# Altium PCB SHMP_MainBoard.PcbDoc (part 2 of 2)
Units mil, origin at the board's own origin, x right, y up, seen from the top; angles counter-clockwise.
Board outline 4724.41 x 2755.91 mil, 4 copper layers (Top Layer, Ground Plane, Power Plane, Bottom Layer), stack 59.692 mil thick; 115 components, 109 nets, 467 pads, 438 vias.
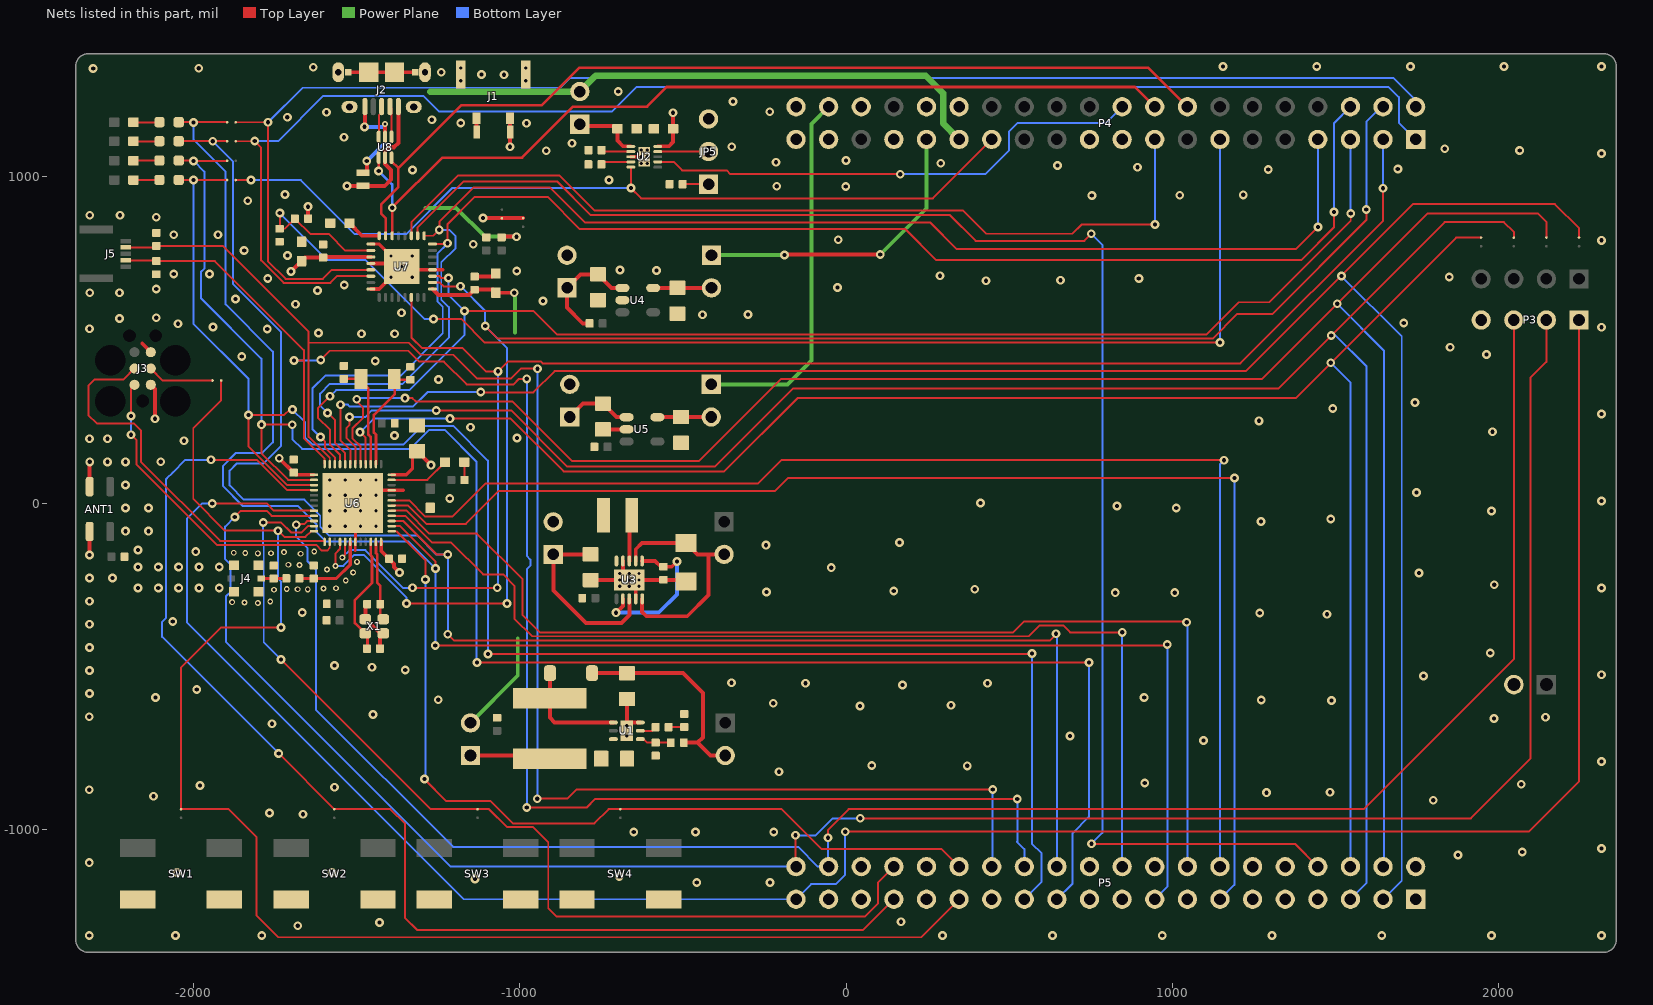
[diagram p4: the nets of this part, all layers, seen from the top]

## Via types
v1: diameter 27, hole 13, Top Layer to Bottom Layer, tented top, 368 vias
v2: diameter 18, hole 10, Top Layer to Bottom Layer, 34 vias
v3: diameter 18, hole 10, Top Layer to Bottom Layer, tented top, 26 vias
v4: diameter 18, hole 10, Top Layer to Bottom Layer, tented both sides, 9 vias
v5: diameter 27, hole 13, Top Layer to Bottom Layer, 1 vias

## Nets (pads, with @x,y where several pads share a name; then routed paths per layer and width w, separated by ;. In a path a pad name is that pad's centre, name@x,y a point inside that pad or via, vN(x,y) a via of type N, cw(c..) or ccw(c..) an arc to the next point about the centre after c; other vN are vias at no path point) (continued)
GND: ANT1.3 ANT1.4 C1.2 C2.2 C3.2 C4.2 C5.2 C6.2 C7.2 C8.2 C9.2 C10.2 C11.2 C12.2 C13.2 C14.2 C15.2 C16.2 C17.2 C18.2 C19.1 C20.2 C21.2 C22.1 C23.2 C24.1 C25.1 C26.1 C27.2 C28.2 C29.2 C30.2 C31.2 C32.2 C33.2 J1.0 J3.5 J4.2 NT3.2 NT6.2 P1.2 P3.4 P4.19 P4.21 P4.30 P4.32 P4.33 P4.36 P4.37 P4.40 P5.1 P5.2 P5.7 P5.9 P5.10 P5.11 P5.12 P5.15 P5.18 P5.19 P5.21 P5.22 P5.27 P5.31 P5.32 P5.35 P5.36 P5.37 R2.1 R4.2 R5.2 R12.1 R13.1 R14.2 R16.2 R18.1 RT1.1 SB2.1 SB3.1 SW1.1 SW2.1 SW3.1 SW4.1 U1.3 U1.7 U2.3 U2.11 U3.4 U3.9 U3.11 U4.2 U5.2 U6.31 U6.45 U6.49 U7.4 U7.17 U7.20 U7.24 U7.33 X1.2 X1.4 | length 1834.3
  Top Layer w8: -1504.3,-146.8 U6.31@-1504.3,-119.09
  Top Layer w9: U6.31@-1504.3,-119.09 U6.49@-1504.3,-7.87
  Top Layer w10: U6.49@-1472.81,39.37 U6.45@-1393.08,39.37 -1357.1,39.37 ; U7.17@-1456.95,793.91 -1431.36,793.91 v4(-1394.94,757.49) ; U2.3@-659.94,1061.7 v2(-627.46,1061.7)
  Top Layer w12: v1@-2319.37,-159.2 ANT1.4@-2319.37,-87.59 ; ANT1.3@-2319.37,50.2 v1@-2319.37,126.3 ; -2157.9,488.6 J3.5@-2131.8,462.5 ; C33.2@-1669.5,800.8 C33.2@-1661.5,792.8 ; C14.2@-1474,-315.5 X1.2@-1474,-356.39 -1471.48,-356.39 X1.4@-1428.18,-399.7 ; U7.24@-1456.95,656.11 -1456.95,656.3 -1431.17,656.3 v4(-1394.94,692.53) v4(-1362.45,725.01) -1372.3,734.85 U7.20@-1456.95,734.85 ; C17.2@-1429,-446.3 X1.4@-1429,-409.82 ; U7.33@-1352.62,715.17 U7.4@-1267.97,715.17 -1237.6,715.17 ; C30.2@-1139.8,694.1 -1083.3,694.1 C31.2@-1073.6,703.8 ; v1(-1112.8,873.6) -1054.5,873.6 -1054.4,873.7 SB3.1@-990.2,873.7 ; C6.2@-782.8,-236.39 U3.11@-665,-236.39 ; C10.2@-745.18,225.82 U5.2@-672.84,225.82 ; U3.11@-684.09,-216.1 U3.4@-684.09,-177.71 ; v2(-672.14,-714.26) U1.7@-672.14,-698.51 v2(-672.14,-682.76) ; C4.2@-672.14,-601.24 v2(-672.14,-682.76) ; v2(-664.4,-235.78) C7.2@-495.2,-235.79 ; U3.9@-644.71,-293.86 U3.11@-644.71,-255.47 ; U1.3@-630.8,-672.92 -662.3,-672.92 v2(-672.14,-682.76) ; v2(-627.46,1061.7) U2.11@-618.6,1061.7
  other v1: -2320.7,-1326.5 -2056.1,-1326.5 -1791.5,-1326.5 296.3,-1325.8 632.97,-1325.8 969.63,-1325.8 1306.3,-1325.8 1642.97,-1325.8 1979.63,-1325.8 2316.3,-1325.8 -1681.3,-1296.1 -1430.3,-1286.5 168.4,-1283.8 -457.4,-1163.7 -233.1,-1163.7 -1137.4,-1152.9 -695.5,-1144.9 -2051,-1133.4 -1576.5,-1132 -2320.7,-1102.75 1876.5,-1079.6 2073.7,-1070.5 2316.3,-1059.4 -650.7,-1008.4 -461.7,-1008.4 -221.8,-1008.4 -1664.9,-954.1 -1767.7,-950.3 1801,-911.4 -2123.8,-898.9 1289.4,-888.1 1484.3,-886.9 -2320.7,-879.01 -1568.3,-871.3 -1980.9,-866.3 2070.6,-862.5 915.8,-858.3 -205.1,-824.2 371.7,-806 78.8,-804.9 2316.3,-793 1096.1,-728.2 687.2,-714.8 -1760.2,-676.9 1987.3,-660.7 2144.8,-656.7 -2320.7,-655.26 -1450.6,-648.8 43,-622.1 321.8,-620 -223.3,-613.8 1488.9,-605.4 1273.4,-604.2 -1250.4,-603.1 -2117.6,-596.7 914.2,-596.3 -2320,-584.4 -1990.9,-571.6 173.2,-557.9 -123.9,-552.9 433.5,-552.9 -350.9,-551.3 1771.1,-530.6 2316.3,-526.6 -2320,-513.53 -1351.7,-512.2 -1453.4,-503.7 -1568.4,-498.1 1975.3,-460.3 -2320,-442.66 -2320,-371.8 -2064.5,-363.7 1475.2,-340.9 1268.9,-337.5 -1667.3,-336 -2320,-300.93 825.4,-274.8 1007.8,-274.8 -244.1,-272.7 146.3,-269.9 394.6,-264.4 -2170.7,-260.7 -2108.53,-260.7 -2046.35,-260.7 -1984.18,-260.7 -1922,-260.7 2316.3,-260.2 1987.7,-250.6 -2320,-230.07 -2249.13,-230.07 1757.3,-214.7 -45.4,-198.2 -2170.7,-196.2 -2108.53,-196.2 -2046.35,-196.2 -1984.18,-196.2 -1922,-196.2 -2320,-159.2 -1993.7,-149.1 -2170.7,-144.4 -245.4,-129.2 164.2,-121 -2209.44,-86.23 -2138.58,-86.23 1272.3,-57 1486.6,-49.1 1979.4,-24.4 -2209.44,-15.42 -2138.58,-15.42 1012.4,-14.9 831.1,-9.2 412.5,0.4 2316.3,6.2 -1215.1,14.2 1749.1,32.2 -2209.44,55.39 -2319.2,126.2 -2264.32,126.2 -2209.44,126.2 -2101.3,126.8 -2029.8,190.8 -2319.37,197.17 -2264.32,197.07 -1008.9,199.1 -1384.4,206.7 1982.2,218.4 -1151.4,232.3 1266.6,251.9 2316.3,272.6 1492.3,289.5 1744.9,308 -1249.9,379.1 -1443.3,435.3 -1853,449.1 1964.2,455.6 1852.5,477.7 -1485.5,518.9 -1384,518.9 -1617.1,521 -2319.37,534.4 -1774.4,533.8 -1940.8,539.4 2316.3,539 -2048.6,549.4 1710.4,552.2 -2227.7,565.7 -2115,568.2 -439.8,577.3 -300.8,577.9 -1363.3,583.2 -1688.2,609.2 -929.1,619.7 -1872.2,625.9 -2319.2,645 -2227.7,645 -1620.3,651.6 -2115,656.3 -26.1,661.1 -1538.4,668.2 429,681.8 658,683.2 -1773,688.8 898,688.7 1849.8,692.8 288.3,697 -2061.4,702.4 -1952,702.4 -1009.3,711.5 -581.4,713.1 -693.3,714.4 -1845.5,774.2 -1143.2,793.2 2316.3,805.4 -23.8,807 -2061.4,822.7 -1925.9,822.7 -2115,876.4 -2319.2,882.4 -2226.3,882.4 -1834.6,926.9 753.9,942.8 1023.4,943.8 1218.2,944.9 -1719.9,945.8 -212.6,971.3 -1,970.6 -726.4,990.5 -1329.5,1020.9 1294.9,1022.8 1692.2,1024.5 893.8,1029.3 648.7,1035 290.6,1042.1 -214.7,1044.9 -0.3,1049.9 2316.3,1071.8 -919.3,1079.9 2065.6,1081.1 1836.1,1086.1 -350.6,1092.3 -840.5,1103.1 -1539.1,1121.3 -1181.6,1165.2 -979.5,1164.7 -1269.9,1175.3 -1713,1183 -1593.2,1198.2 -233.8,1199.7 -346.7,1230.9 -698.2,1261.5 -1048.5,1313.2 -1117.9,1313.9 -1241.1,1321 -2308.5,1332.1 -1984.4,1333.2 -1633.4,1336.2 1156,1338.2 1443.27,1338.2 1730.55,1338.2 2017.82,1338.2 2316.3,1338.2
  other v2: -693.93,-255.47 -664.4,-255.47 -634.87,-255.47 -693.93,-235.78 -634.87,-235.78 -693.93,-216.1 -664.4,-216.1 -634.87,-216.1 -1583.04,-70.86 -1535.8,-70.86 -1488.56,-70.86 -1441.31,-70.86 -1583.04,-23.62 -1535.8,-23.62 -1488.56,-23.62 -1441.31,-23.62 -1583.04,23.63 -1535.8,23.63 -1488.56,23.63 -1441.31,23.63 -1583.04,70.87 -1535.8,70.87 -1488.56,70.87 -1441.31,70.87 -627.46,1041.03 -609.74,1041.03 -609.74,1061.7 -627.46,1082.37 -609.74,1082.37
  other v3: -1803.38,-306.5 -1844.38,-304.7 -1882.18,-304 -1765.58,-302.2 -1754.08,-265.8 -1650.3,-264.7 -1714.88,-264 -1681.38,-264.4 -1602.28,-262.2 -1564.18,-261.5 -1533.8,-237.9 -1511.3,-213.2 -1591.6,-204 -1675.98,-189.9 -1709.88,-189.2 -1499.2,-180.4 -1672.3,-155.4 -1803.38,-154.3 -1763.5,-154.2 -1877.48,-152.5 -1842,-153 -1723.48,-150.7 -1630.38,-148.6
  other v4: -1329.98,692.53 -1329.98,757.49 -1181.11,1294.57 -982.29,1294.57 -1181.11,1333.94 -982.29,1333.94
  other v5: -1712.5,758.6
GPIO02: P5.8 U7.10 | length 4855.5
  Top Layer w6: U7.10@-1313.24,819.5 -1313.24,844.96 -1171.7,986.5 -886.2,986.5 -783.5,883.8 317.4,883.8 397.2,804 730.65,804 v1(752.15,825.5) ; v1(752.6,-1045) 1376.8,-1045 P5.8@1446.8,-1115
  Bottom Layer w6: v1(752.15,825.5) 786,791.65 786,-1011.6 v1(752.6,-1045)
ISET: R4.1 U2.2 | length 84.9
  Top Layer w6: R4.1@-744.85,1077.45 U2.2@-659.94,1077.45
ISET2: P4.20 U2.7 | length 1559.3
  Top Layer w6: U2.7@-577.26,1045.95 -528.65,1045.95 -502.6,1019.9 -366.3,1019.9 -354.6,1008.2 v1(166.2,1008.2)
  Bottom Layer w6: v1(166.2,1008.2) 427.1,1008.2 499.4,1080.5 499.4,1138.4 525.8,1164.8 796.6,1164.8 P4.20@846.8,1215
NetC2_1: C2.1 JP2.1 L1.1 U1.6 | length 232.8
  Top Layer w12: JP2.1@-1151.4,-773.6 L1.1@-918.62,-773.6
NetC3_1: C3.1 JP1.1 U2.1 | length 205.4
  Top Layer w12: JP1.1@-816.1,1161.7 -809.9,1155.5 -708.8,1155.5 C3.1@-701.1,1147.8 -701.1,1111.7 -683.38,1093.98 U2.1@-659.94,1093.98
NetC4_1: C4.1 D1.1 JP3.2 R1.2 | length 667.2
  Top Layer w12: D1.1@-778.7,-521.4 C4.1@-672.1,-521.4 ; C4.1@-671.7,-521.8 -499.7,-521.8 -438.6,-582.9 -438.6,-718.5 -454.9,-734.8 ; R1.2@-497.4,-734.8 -454.9,-734.8 ; JP3.2@-370.2,-774.2 -415.5,-774.2 -454.9,-734.8
NetC5_1: C5.1 R3.2 | length 47.6
  Top Layer w6: R3.2@-544.1,-687.2 C5.1@-496.5,-687.2
NetC6_1: C6.1 JP4.1 L2.1 U3.5 U3.8 | length 557.7
  Top Layer w12: C6.1@-782.8,-157.39 -896.4,-157.39 -896.4,-268.79 -797.69,-367.5 -688.01,-367.5 -664.4,-343.89 U3.8@-664.4,-293.86
NetC7_1: C7.1 JP6.2 U3.2 U3.10 | length 729.9
  Top Layer w12: U3.2@-644.71,-177.71 -644.71,-141.7 -625.5,-122.49 C7.1@-490.5,-122.49 -455.5,-157.49 JP6.2@-373.8,-157.49 ; U3.10@-625.03,-293.86 -625.03,-333.77 -611.7,-347.1 -486.7,-347.1 -421.8,-282.2 -421.8,-157.2
NetC9_1: C9.1 JP7.1 R6.2 U4.1 | length 354
  Top Layer w12: R6.2@-786.2,550.7 -807.1,550.7 -855.3,598.9 JP7.1@-855.3,659.7 -813.8,701.2 C9.1@-760.3,701.2 -718.5,659.4 U4.1@-685.64,659.4
NetC10_1: C10.1 JP9.1 U5.1 | length 208.4
  Top Layer w12: JP9.1@-847.1,263.8 -806.2,304.7 C10.1@-745.3,304.7 -703.82,263.22 U5.1@-672.84,263.22
NetC11_1: C11.1 JP8.2 U4.5 | length 178.4
  Top Layer w12: U4.5@-591.16,659.4 C11.1@-517.5,659.4 ; C11.1@-517.2,659.7 JP8.2@-412.5,659.7
NetC12_1: C12.1 JP10.2 U5.5 | length 164.7
  Top Layer w12: U5.5@-578.36,263.22 JP10.2@-413.68,263.22
NetC24_2: C24.2 L5.1 U6.30 | length 243.4
  Top Layer w10.11: L5.1@-1675.88,-231.5 C24.2@-1632.38,-231.5 -1562.58,-231.5 -1519.95,-188.87 -1519.95,-119.2 U6.30@-1520.05,-119.09
NetD1_2: D1.2 L1.2 U1.4 | length 337.8
  Top Layer w12: D1.2@-907.7,-521.4 -907.7,-598.48 L1.2@-908.2,-598.98 -908.2,-658.1 -893.38,-672.92 U1.4@-713.48,-672.92
NetD2_1: D2.1 R7.1 | length 79.3
  Top Layer w6: R7.1@-2184.9,1167.4 D2.1@-2105.63,1167.4
NetD3_1: D3.1 R8.1 | length 79.3
  Top Layer w6: R8.1@-2184.9,1109.1 D3.1@-2105.63,1109.1
NetD4_1: D4.1 R9.1 | length 79.3
  Top Layer w6: R9.1@-2184.9,990.4 D4.1@-2105.63,990.4
NetD5_1: D5.1 R10.1 | length 79.3
  Top Layer w6: R10.1@-2184.9,1049.7 D5.1@-2105.63,1049.7
NetL2_2: L2.2 U3.3 | length 132.6
  Top Layer w12: U3.3@-664.4,-177.71 L2.2@-664.4,-45.09
NetL3_2: L3.2 L4.1 | length 53.9
  Top Layer w6: L3.2@-1170,70.6 L4.1@-1170,124.5
NetL4_2: L4.2 U6.47 | length 185.9
  Top Layer w6: U6.47@-1393.08,70.87 -1283.83,70.87 L4.2@-1229.6,125.1
NetR1_1: R1.1 R2.2 U1.1 | length 97.7
  Top Layer w6: U1.1@-630.8,-724.1 -620.5,-724.1 -609.9,-734.7 R2.2@-584,-734.7 R1.1@-537.5,-734.7
NetR3_1: R3.1 U1.2 | length 35.4
  Top Layer w6: U1.2@-630.8,-698.51 R3.1@-595.41,-698.51
P0.02/AIN0: P5.6 SB15.2 U6.4 | length 5494.2
  Top Layer w6: v1(-1490.1,217.3) -1472.81,200.01 U6.4@-1472.81,119.1 ; v1(-1214,258.7) -1028.18,258.7 -866.18,96.7 -373.4,96.7 -148.7,321.4 1378.4,321.4 1870.9,813.9 SB15.2@1947.4,813.9
  Bottom Layer w6: v1(-1490.1,217.3) -1448.7,258.7 v1(-1214,258.7) ; v1(1486.4,430) 1546.8,369.6 P5.6@1546.8,-1115
P0.03/AIN1: P5.4 SB13.2 U6.5 | length 6120.3
  Top Layer w6: v1(-1500.4,318.2) -1500.4,312.1 -1481.5,293.2 -1481.5,260.6 -1513.6,228.5 -1513.6,198.3 -1488.56,173.26 U6.5@-1488.56,119.1 ; v1(-1352.5,321.6) -1329.8,321.6 -1320,311.8 -1023.3,311.8 -839.8,128.3 -450.8,128.3 -199.4,379.7 1274.8,379.7 v1(1506.1,611) 1782.7,887.6 2122.4,887.6 2147.7,862.3 SB13.2@2147.7,813.9
  Bottom Layer w6: v1(-1500.4,318.2) -1497,321.6 v1(-1352.5,321.6) ; v1(1506.1,611) 1649.7,467.4 1649.7,-1112.1 P5.4@1646.8,-1115
P0.04/AIN2: P5.5 SB14.2 U6.6 | length 5952.4
  Top Layer w6: v1(-1522.5,263.5) -1522.5,238.7 -1531.1,230.1 -1531.1,198.83 -1504.3,172.03 U6.6@-1504.3,119.1 ; v1(-1256.6,283.8) -1027.1,283.8 -854.7,111.4 -402.5,111.4 -163.3,350.6 1324.9,350.6 v1(1487.85,513.55) 1835.9,861.6 2017.5,861.6 2047.9,831.2 SB14.2@2047.9,813.9
  Bottom Layer w6: v1(-1522.5,263.5) -1474.4,263.5 -1454.1,283.8 v1(-1256.6,283.8) ; v1(1487.85,513.55) 1501.75,513.55 1596.7,418.6 1596.7,-1165.1 P5.5@1546.8,-1215
P0.05/AIN3: P5.3 SB12.2 U6.7 | length 6346.5
  Top Layer w6: v1(-1550.3,301.5) -1550.3,192.9 -1520.05,162.65 U6.7@-1520.05,119.1 ; v1(-1119.8,340.4) -1129,340.4 -1130.2,339.2 -958.6,339.2 -893.4,404.4 1226,404.4 v1@1519,697.4 ; v1(1519,695.9) v1@1519,697.4 ; SB12.2@2247.7,813.9 2247.7,842.7 2173.8,916.6 1738.2,916.6 v1@1519,697.4
  Bottom Layer w6: v1(-1550.3,301.5) -1527.2,301.5 -1521.4,295.7 -1491.08,295.7 -1490.98,295.8 -1327.8,295.8 -1283.2,340.4 v1(-1119.8,340.4) ; v1(1519,695.9) 1704.1,510.8 1704.1,-1157.7 P5.3@1646.8,-1215
P0.06: P4.7 U6.8 U7.9 | length 4301.7
  Top Layer w6: v1(-1589.6,276.3) -1566.4,253.1 -1566.4,183.3 -1535.8,152.7 U6.8@-1535.8,119.1 ; U7.9@-1293.56,819.5 -1265.7,819.5 -1247.6,837.6 v1(-1247.1,837.6) -1247.1,862.5 -1142.6,967 -907.2,967 -801,860.8 257.6,860.8 340.1,778.3 1379.4,778.3 v1(1447.1,846)
  Bottom Layer w6: v1(-1589.6,276.3) -1612.2,298.9 -1612.2,335.6 -1582.4,365.4 -1359.4,365.4 -1218,506.8 -1218,600.57 -1241.1,623.67 -1241.1,737.7 -1197.1,781.7 -1197.1,818.1 -1216.6,837.6 v1(-1247.1,837.6) ; v1(1447.1,846) P4.7@1447.1,1114.7
P0.07: P4.5 U6.9 U7.3 | length 4130.1
  Top Layer w6: v1(-1582.4,327.2) -1619.1,290.5 -1619.1,261.8 -1581.7,224.4 -1581.7,178.4 -1551.55,148.25 U6.9@-1551.55,119.1 ; U7.3@-1267.97,695.48 -1246.48,695.48 -1240.6,689.6 v1(-1218.6,689.6) ; v1(-1169.6,588.6) -957.7,588.6 -885.7,516.6 1105.1,516.6 1204.1,615.6 1297.9,615.6 1547.8,865.5 v1(1547.8,887.6)
  Bottom Layer w6: v1(-1582.4,327.2) -1563.3,346.3 -1338.6,346.3 -1169.6,515.3 v1(-1169.6,588.6) -1218.6,637.6 v1(-1218.6,689.6) ; P4.5@1546.8,1115 1546.8,888.6 v1(1547.8,887.6)
P0.08: P4.6 U6.10 U7.8 | length 4396.6
  Top Layer w6: v1(-1611.4,202.1) -1598.1,188.8 -1598.1,171 -1567.3,140.2 U6.10@-1567.3,119.1 ; U7.8@-1267.97,793.91 -1224.79,793.91 v1(-1221.9,796.8) -1221.9,854.5 -1138,938.4 -915.1,938.4 -817.6,840.9 180.9,840.9 277.1,744.7 1395.3,744.7 1496.4,845.8 v1(1496.4,892.3)
  Bottom Layer w6: v1(-1611.4,202.1) -1635.9,226.6 -1635.9,351.3 -1596.3,390.9 -1365.7,390.9 -1236.5,520.1 -1236.5,602.1 -1253.1,618.7 -1253.1,763.9 -1221.9,795.1 v1(-1221.9,796.8) ; v1(1496.4,892.3) 1496.4,1164.6 P4.6@1546.8,1215
P0.09/NFC1: C27.1 J5.2 P5.28 U6.11 | length 4821.8
  Top Layer w6: J5.2@-2208.5,783.6 C27.1@-2119.5,783.6 ; C27.1@-2114.8,788.3 -1911.2,788.3 -1647.5,524.6 -1647.5,491.4 ; U6.11@-1583.04,119.1 -1583.04,138.54 -1647.5,203 -1647.5,491.4 ; v1(-946.5,-906.6) -855.2,-906.6 -827.2,-878.6 v1(449.9,-878.6) ; v1(-946.1,411.9) -997.3,411.9 -1028,381.2 -1131.3,381.2 -1204.7,454.6 -1304,454.6 -1340.8,491.4 -1647.5,491.4
  Bottom Layer w6: v1@-946.1,-906.7 v1(-946.1,411.9) ; P5.28@446.8,-1115 449.9,-1111.9 v1(449.9,-878.6)
P0.10/NFC2: C23.1 J5.4 P5.26 U6.12 | length 4895.3
  Top Layer w6: J5.4@-2208.5,744.23 C23.1@-2117.33,744.23 ; C23.1@-2114.8,741.7 -1935.2,741.7 -1662.5,469 -1662.5,437.1 ; v1(-1693,437.1) -1662.5,437.1 ; v1(-1610.5,438.9) -1582.5,466.9 -1342.6,466.9 -1309.2,433.5 -1233,433.5 -1163.5,364 -1019.4,364 -1002.7,380.7 v1(-978.8,380.7) ; U6.12@-1598.79,119.1 -1598.79,135.39 -1662.5,199.1 -1662.5,437.1 ; v1(-978.9,-933.7) -795.6,-933.7 -769.4,-907.5 v1(525.3,-907.5)
  Bottom Layer w6: v1(-1693,437.1) -1612.3,437.1 v1(-1610.5,438.9) ; v1@-978.8,-933.7 -978.8,-203.42 -967.6,-192.22 -967.6,-173.58 -978.8,-162.38 v1(-978.8,380.7) ; v1(525.3,-907.5) 525.3,-1037.6 524.2,-1038.7 546.8,-1061.3 P5.26@546.8,-1115
P0.11: D5.2 P5.23 SB11.2 U6.14 | length 5374.6
  Top Layer w6: D5.2@-2046.17,1050.1 -2001.8,1050.1 v1@-2001.2,1049.5 ; v1(-2000.6,1048.9) SB11.2@-1897.9,1048.9 ; v1(-1697.7,240.1) -1697.9,240.3 v1(-1792.5,240.3) -1792.5,152.8 -1710.57,70.87 U6.14@-1631.27,70.87 ; v1(-1131.5,-488.7) -1131.9,-488.7 -1132.2,-488.4 744.4,-488.4 v1(745,-489)
  Bottom Layer w6: v1(-2000.6,1048.9) -1967.6,1015.9 -1967.6,718.62 -1977.8,708.42 -1977.8,628.1 -1792.5,442.8 v1(-1792.5,240.3) ; v1(-1697.7,240.1) -1697.7,196.2 -1667.6,166.1 -1336.6,166.1 -1278.5,224.2 -1230.82,224.2 -1132.4,125.78 v1@-1132.4,-488.7 ; P5.23@646.8,-1215 695.1,-1166.7 695.1,-1012.2 745,-962.3 v1(745,-489)
P0.12: D4.2 P5.25 SB10.2 U6.15 | length 5213.1
  Top Layer w6: D4.2@-2046.17,990.8 -2001.5,990.8 v1(-2000.9,990.2) SB10.2@-1897.9,990.2 ; v1(-1697.3,286.6) -1706,286.6 -1722.6,270 v1(-1832.4,270) -1832.4,174.77 -1712.75,55.12 U6.15@-1631.27,55.12 ; v1(-1097.7,-462.8) v1@571.7,-462.8
  Bottom Layer w6: v1(-2000.9,990.2) -2000.9,550.3 -1832.4,381.8 v1(-1832.4,270) ; v1(-1697.3,286.6) -1659.2,248.5 -1659.2,202.1 -1636.7,179.6 -1356.4,179.6 -1299.8,236.2 -1204.68,236.2 -1098.2,129.72 v1@-1098.2,-461.5 ; P5.25@546.8,-1215 599.9,-1161.9 599.9,-1074.4 570,-1044.5 v1(570,-461.5)
P0.13: P5.33 SB5.1 U6.16 | length 3830
  Top Layer w6: v1(-1947.4,132.4) -1807,132.4 -1713.97,39.37 U6.16@-1631.27,39.37 ; v1(-1739.7,-767.9) SB5.1@-1568.9,-938.7 -1396.8,-938.7 -1351.7,-983.8 -1351.7,-1272.9 -1315.5,-1309.1 52.7,-1309.1 P5.33@146.8,-1215
  Bottom Layer w6: v1(-1947.4,132.4) -2025.81,132.4 -2064.91,93.3 -2082.67,75.85 -2084.7,73.82 -2084.7,-352.08 -2097.1,-364.48 -2097.1,-410.5 v1(-1739.7,-767.9)
P0.15: P3.1 P5.39 U6.20 | length 6997.5
  Top Layer w6: v1(-1943.5,-1.1) -1776.8,-1.1 -1754.28,-23.62 U6.20@-1631.27,-23.62 ; v1(-2.2,-1007.9) 2092.9,-1007.9 2247.7,-853.1 P3.1@2247.7,561.26
  Bottom Layer w6: v1(-1943.5,-1.1) -1973.6,-1.1 -2021,-48.5 -2021,-365.7 -1171.7,-1215 P5.39@-153.2,-1215 -107,-1168.8 -31.6,-1168.8 -2.7,-1139.9 v1@-2.7,-1007.9
P0.16: P3.2 P5.40 U6.21 | length 6513.7
  Top Layer w6: v1(-1874,-42.8) -1855.2,-24 -1776.5,-24 -1761.13,-39.37 U6.21@-1631.27,-39.37 ; v1(-154.9,-1019) -154.9,-1109.9 -151.5,-1113.3 P5.40@-153.2,-1115 ; v1(43.7,-966.9) 1915.8,-966.9 2098.8,-783.9 2098.8,383.7 2147.7,432.6 P3.2@2147.7,561.26
  Bottom Layer w6: v1(-1874,-42.8) -1903.8,-72.6 -1903.8,-172 -1886.8,-189 -1886.8,-272 -1901.5,-286.7 -1901.5,-425.8 -1212.3,-1115 P5.40@-153.2,-1115 ; v1(-154.9,-1019) -93.1,-1019 -41,-966.9 v1(43.7,-966.9)
P0.19: P3.3 P5.38 U6.22 | length 5898.1
  Top Layer w6: v1(-1685.9,-66.5) -1685.9,-63.83 -1660.1,-63.83 -1651.39,-55.11 U6.22@-1631.27,-55.11 ; v1(-55.1,-1026.4) -55.1,-1002 8,-938.9 1587.5,-938.9 2047.7,-478.7 P3.3@2047.7,561.26
  Bottom Layer w6: v1(-1685.9,-66.5) -1685.9,-103 -1651.4,-137.5 -1651.4,-177.8 -1625.7,-203.5 -1625.7,-633.6 -1204.8,-1054.5 -146.5,-1054.5 -86,-1115 P5.38@-53.2,-1115 -55.1,-1113.1 v1(-55.1,-1026.4)
P0.20: P5.34 SB6.1 U6.23 | length 3048.2
  Top Layer w6: v1(-1787,-59.9) -1731.8,-59.9 -1701.8,-89.9 -1669.2,-89.9 -1650.16,-70.86 U6.23@-1631.27,-70.86 ; v1@-1735.4,-477.2 v1(-1732.4,-480.2) -1273.9,-938.7 SB6.1@-1129.9,-938.7 -1094.7,-938.7 -1039.3,-994.1 -959,-994.1 -913,-1040.1 -913,-1242.4 -887.3,-1268.1 57.8,-1268.1 98.4,-1227.5 98.4,-1163.4 P5.34@146.8,-1115
  Bottom Layer w6: v1(-1787,-59.9) -1787,-125.9 -1785.38,-127.52 -1785.38,-427.22 v1(-1732.4,-480.2)
P0.21/RESET: P5.29 SB1.1 SB4.1 U6.24 | length 4653.5
  Top Layer w6: SB4.1@-2039.4,-938.7 -2039.4,-505.5 -1915.4,-381.5 v1(-1732.88,-381.5) ; SB4.1@-2039.1,-938.7 -1893.3,-938.7 -1807.2,-1024.8 -1807.2,-1265.2 -1740.9,-1331.5 230.3,-1331.5 P5.29@346.8,-1215 ; SB1.1@-1915.8,375.7 -1915.8,315.4 -2001.6,229.6 -2001.6,12.4 -1904.3,-84.9 v1(-1741.4,-84.9) -1722.3,-104 -1657.7,-104 -1640.31,-86.61 U6.24@-1631.27,-86.61
  Bottom Layer w6: v1(-1741.4,-84.9) -1741.4,-143.16 -1741.48,-143.24 -1741.48,-158.15 -1741.4,-158.23 -1741.4,-231.9 -1732.88,-240.42 v1(-1732.88,-381.5)
P0.23: P4.4 U6.28 U7.2 | length 5053.8
  Top Layer w6: v3(-1565.2,-193) -1565.2,-154.4 -1551.55,-140.75 U6.28@-1551.55,-119.09 ; v1@-1347.8,-308.2 v1(-1347.5,-307.9) v1(-1039.7,-307.9) ; U7.2@-1267.97,675.8 -1245.4,675.8 -1234,664.4 v1(-1181.9,664.4) ; v1(-1106.3,542.7) -1067.7,504.1 1123.9,504.1 1198.7,578.9 1306.5,578.9 1595.4,867.8 v1(1595.4,900.2)
  Bottom Layer w6: v3(-1565.2,-193) v3@-1565.2,-185.7 ; v3@-1557.9,-193 -1541.5,-193 -1507.5,-159 -1478.5,-159 -1347.5,-290 v1(-1347.5,-307.9) ; v1(-1181.9,664.4) -1106.3,588.8 v1(-1106.3,542.7) -1039.7,476.1 v1(-1039.7,-307.9) ; v1(1595.4,900.2) 1595.4,1169.1 1641.3,1215 P4.4@1646.8,1215
P0.24: P4.3 U6.29 U7.30 | length 4839.4
  Top Layer w6: v3(-1544.4,-166.9) -1535.8,-158.3 U6.29@-1535.8,-119.09 ; U7.30@-1332.6,630.52 -1332.6,507.51 -1299.99,474.9 -1175.4,474.9 -1104.2,403.7 v1(-1067,403.7) -1036.3,434.4 -936.78,434.4 -930.28,427.9 1209,427.9 1646.8,865.7 v1(1646.8,965.2) ; v1(-1329.3,-260) v1(-1069.6,-260)
  Bottom Layer w6: v3(-1544.4,-166.9) -1522.2,-144.7 -1473.9,-144.7 -1358.6,-260 v1(-1329.3,-260) ; v1(-1069.6,-260) -1067,-257.4 v1(-1067,403.7) ; v1(1646.8,965.2) P4.3@1646.8,1115
P0.25: P5.30 SB7.1 U6.37 | length 2599.2
  Top Layer w6: U6.37@-1393.08,-86.61 -1378.29,-86.61 -1289.8,-175.1 v1(-1289.8,-234.7) ; v1(-1292.8,-846.3) -1225.3,-913.8 -1089.5,-913.8 -1021.2,-982.1 -771.5,-982.1 -728.1,-938.7 SB7.1@-691.7,-938.7 -197.4,-938.7 -75.5,-1060.6 292.4,-1060.6 P5.30@346.8,-1115
  Bottom Layer w6: v1(-1292.8,-846.3) -1289.8,-843.3 v1(-1289.8,-234.7)
P0.26: D2.2 P5.17 SB8.2 U6.38 | length 5728.9
  Top Layer w6: D2.2@-2046.07,1167.7 SB8.2@-1897.9,1167.7 ; U6.38@-1393.08,-70.86 -1367.34,-70.86 -1258.4,-179.8 v1(-1258.4,-201.1) ; v1(-1259.3,-437.1) 985,-437.1 v1(985,-433.9)
  Bottom Layer w6: v1(-2000.4,1167.1) -2000.4,1114 -1902.4,1016 -1902.4,609.3 -1757.3,464.2 -1757.3,186.1 -1789.9,153.5 -1870.5,153.5 -1911,113 -1911,52.7 -1849,-9.3 -1679.7,-9.3 -1624.1,-64.9 -1624.1,-88.6 -1595.2,-117.5 -1342,-117.5 v1(-1258.4,-201.1) -1257.2,-202.3 -1259.3,-204.4 v1(-1259.3,-437.1) ; P5.17@946.8,-1215 985.33,-1176.47 985.33,-434.23 v1(985,-433.9)
P0.27: D3.2 P5.24 SB9.2 U6.39 | length 5237
  Top Layer w6: D3.2@-2045.97,1109.7 SB9.2@-1897.9,1109.7 ; U6.39@-1393.08,-55.11 -1358.09,-55.11 -1255.3,-157.9 v1(-1221,-157.9) ; v1(-1221,-402.2) -1202.2,-421 626.2,-421 v1@645.1,-402.1
  Bottom Layer w6: v1(-1941.8,1109.2) -1880.1,1047.5 -1880.1,672 -1733,524.9 -1733,174.02 -1786.32,120.7 -1868.9,120.7 -1890.3,99.3 -1890.3,54 -1846.6,10.3 -1660.8,10.3 -1612.1,-38.4 -1612.1,-72.9 -1585.6,-99.4 -1315.3,-99.4 -1256.8,-157.9 v1(-1221,-157.9) v1(-1221,-402.2) ; v1(643.6,-400.6) 646.8,-403.8 P5.24@646.8,-1115
P0.28/AIN4: P5.20 U6.40 | length 3192.4
  Top Layer w6: U6.40@-1393.08,-39.37 -1350.93,-39.37 -1269,-121.3 -1210.4,-121.3 -1112.8,-218.9 -1051.7,-218.9 -1016.6,-254 -1016.6,-354.2 -962.3,-408.5 560.6,-408.5 593.6,-375.5 665.9,-375.5 687,-396.6 v1(846.9,-396.6)
  Bottom Layer w6: P5.20@846.8,-1115 v1@846.8,-396.6
P0.29/AIN5: P5.16 U6.41 | length 3421.2
  Top Layer w6: U6.41@-1393.08,-23.62 -1347.38,-23.62 -1277.2,-93.8 -1131.6,-93.8 -992.6,-232.8 -992.6,-342.7 -938.8,-396.5 512.6,-396.5 545.6,-363.5 1042.2,-363.5 v1(1044.5,-365.8)
  Bottom Layer w6: v1(1044.5,-365.8) 1046.8,-368.1 P5.16@1046.8,-1115
P0.30/AIN6: P5.13 U6.42 | length 3975.9
  Top Layer w6: U6.42@-1393.08,-7.87 -1342.83,-7.87 -1287,-63.7 -1165.3,-63.7 -1064.3,37.3 -217,37.3 -177.2,77.1 v1(1191,77.1)
  Bottom Layer w6: P5.13@1146.8,-1215 1191,-1170.8 v1(1191,77.1)
P0.31/AIN7: P5.14 U6.43 | length 3895.5
  Top Layer w6: U6.43@-1393.08,7.88 -1339.78,7.88 -1291,-40.9 -1206.3,-40.9 -1106.2,59.2 -270.3,59.2 -198.1,131.4 v1(1159.3,131.4)
  Bottom Layer w6: P5.14@1146.8,-1115 1146.8,118.9 v1(1159.3,131.4)
P\G\: P4.27 SB10.1 U2.5 | length 2597.4
  Top Layer w6: SB10.1@-1871.3,990.4 v1@-1824.5,990.4 ; U2.5@-659.94,1030.2 -659.94,966.34 v1(-659.5,965.9) -628,934.4 266.2,934.4 P4.27@446.8,1115
  Bottom Layer w6: v1(-1824.4,990.3) -1671.3,990.3 -1505.7,824.7 -1347.9,824.7 -1206.7,965.9 v1(-659.5,965.9)
P\O\W\E\R\: P4.17 U7.11 | length 2731.2
  Top Layer w6: U7.11@-1332.93,819.5 -1332.93,860.87 -1188.9,1004.9 -879.1,1004.9 -771.5,897.3 358.2,897.3 429.9,825.6 694.4,825.6 722.8,854 v1(947.8,854)
  Bottom Layer w6: P4.17@946.8,1115 947.8,1116 v1(947.8,854)
PRETERM: R5.1 U2.4 | length 82.2
  Top Layer w6: R5.1@-742.15,1045.95 U2.4@-659.94,1045.95
R\E\S\E\T\: P4.13 R17.1 R18.2 U7.18 | length 4057.1
  Top Layer w6: R18.2@-1737,841 -1720.9,841 R17.1@-1689.8,872.1 -1641.9,824.2 -1584.8,824.2 -1534.82,774.22 U7.18@-1456.95,774.22 ; R18.2@-1736,842 v1(-1736,889) ; v1(-1264.9,564) -1264.5,563.6 -1178.8,563.6 -1107.2,492 v1(1146.7,492)
  Bottom Layer w6: v1(-1736,889) -1592.8,745.8 -1473.66,745.8 -1291.86,564 v1(-1264.9,564) ; v1(1146.7,492) 1146.7,488.9 1146.8,488.8 P4.13@1146.8,1115
R\X\L\E\D\: P4.2 SB8.1 U7.21 | length 4499.4
  Top Layer w6: SB8.1@-1871.3,1167.5 v1@-1772.3,1167.5 ; v1@-1772.5,1167.4 -1772.5,741.1 -1718.5,687.1 -1604.3,687.1 -1576.23,715.17 U7.21@-1456.95,715.17
  Bottom Layer w6: v1(-1772.3,1167.4) -1666.4,1273.3 -875.9,1273.3 -845.3,1303.9 1678.5,1303.9 1746.8,1235.6 P4.2@1746.8,1215
RESET_N: J3.3 SB1.2 | length 204.7
  Top Layer w6: J3.3@-2131.8,412.5 -2094.8,375.5 SB1.2@-1942.4,375.5
RF: C25.2 J4.1 L5.2 | length 77.4
  Top Layer w10.11: J4.1@-1793.41,-231.4 L5.2@-1715.98,-231.4
RT1: JP5.1 RT1.2 | length 79.4
  Top Layer w6: RT1.2@-501,977.8 JP5.1@-421.6,977.8
RT2: JP5.3
S2.8V: JP10.1 P4.38 | length 1137.4
  Power Plane w12: JP10.1@-413.1,363.8 -179,363.8 -105.4,437.4 -105.4,1162.8 P4.38@-53.2,1215
SWDCLK: J3.4 U6.25 | length 1191.1
  Top Layer w6: J3.4@-2181.8,412.5 -2215.3,379 -2304.1,379 -2323.1,360 -2323.1,269.8 -2297.5,244.2 -2183.9,244.2 -2162.4,222.7 -2162.4,126.7 -1919.3,-116.4 U6.25@-1601.49,-116.4
SWDIO: J3.2 U6.26 | length 979.1
  Top Layer w6: v1(-2192.1,266.7) -2192.1,352.2 J3.2@-2181.8,362.5 ; v1@-2191.7,208.8 -2175.1,192.2 -2175.1,117.5 -1929.2,-128.4 -1625.1,-128.4 -1607.5,-146 -1591.17,-146 -1583.04,-137.87 U6.26@-1583.04,-119.09
  Bottom Layer w6: v1(-2192.1,209.2) v1(-2192.1,266.7)
T\X\L\E\D\: P4.1 SB9.1 U7.22 | length 4586.4
  Top Layer w6: SB9.1@-1871.3,1109.3 v1@-1813.2,1109.3 ; v1(-1813.2,1109.7) -1793.3,1089.8 -1793.3,744.2 -1724.2,675.1 -1581.2,675.1 -1560.82,695.48 U7.22@-1456.95,695.48
  Bottom Layer w6: v1(-1813.2,1109.7) -1741.3,1109.7 -1602.6,1248.4 -1296,1248.4 -1247.83,1200.23 -717.77,1200.23 -641.8,1276.2 1663.2,1276.2 1695.1,1244.3 1695.1,1166.7 P4.1@1746.8,1115
TS: JP5.2 U2.9 | length 155.5
  Top Layer w6: U2.9@-577.26,1077.45 JP5.2@-421.75,1077.45
USB_D_N: P4.16 U7.15 U8.6 | length 2872.4
  Top Layer w8: U7.15@-1411.67,819.5 -1411.67,873.37 -1425.3,887 -1425.3,916 -1372.8,968.5 -1372.8,1026.8 ; U8.6@-1393.62,1059.21 -1393.62,1047.61 -1372.8,1026.8 ; P4.16@1046.8,1215 927.2,1334.6 -818.2,1334.6 -933.4,1219.4 -1180.2,1219.4 -1372.8,1026.8
USB_D_P: P4.18 U7.14 U8.4 | length 2770.8
  Top Layer w8: v1(-1433.1,1018.4) -1433.1,1059.09 U8.4@-1432.99,1059.21 ; U7.14@-1391.5,822.39 v1(-1391.5,905.4) -1238,1058.9 -993.5,1058.9 -837.1,1215.3 -610.2,1215.3 -549.9,1275.6 886.2,1275.6 P4.18@946.8,1215
  Bottom Layer w8: v1(-1433.1,1018.4) -1391.5,976.8 v1(-1391.5,905.4)
USBD_N_IN: J2.2 U8.1 | length 94.9
  Top Layer w6: J2.2@-1398.24,1215.59 -1393.62,1210.96 U8.1@-1393.62,1122.59
USBD_P_IN: J2.3 U8.3 | length 96.2
  Top Layer w6: U8.3@-1432.55,1123.03 -1432.55,1188.55 -1423.83,1197.27 J2.3@-1423.83,1215.59
USBGND: J2.0 J2.5 NT6.1 U8.2 | length 543.8
  Top Layer w12: J2.0@-1526.19,1320.9 J2.0@-1463.2,1320.9 J2.0@-1384.46,1320.9 J2.0@-1321.47,1320.9 ; v1@-1475.01,1154.49 J2.5@-1475.01,1215.59 ; v1(-1469.4,1048.7) -1469.2,1048.5 NT6.1@-1469.2,1012.9 ; U8.2@-1413.3,1122.59 v2(-1413.3,1161.9)
  Bottom Layer w12: v1(-1476.1,1153.4) -1421.8,1153.4 v2(-1413.3,1161.9) -1413.3,1104.8 v1(-1469.4,1048.7)
VAUX: C8.1 U3.1 U3.7 | length 483.4
  Top Layer w12: v1(-704.9,-336.18) -684.09,-315.37 U3.7@-684.09,-293.86 ; U3.1@-625.03,-177.71 -585.89,-177.71 -568.12,-195.49 C8.1@-559.7,-195.49 -534.28,-195.49 v1(-517.9,-179.1)
  Bottom Layer w12: v1(-704.9,-336.18) -574.09,-336.18 -517.9,-280 v1(-517.9,-179.1)
VBAT: C1.1 JP2.2 JP4.2 JP7.2 JP9.2 NT2.2 P4.39 U2.10 | length 495.9
  Top Layer w12: v1(-1030.2,1092.3) NT2.2@-1030.2,1127.4 ; U2.10@-577.26,1093.98 -542.52,1093.98 -530.1,1106.4 C1.1@-530.1,1147.8 v1(-530.1,1196.7)
  Power Plane w12: JP2.2@-1151.4,-674.2 -1006.5,-529.3 -1006.5,-416
VBAT_N: J1.2 NT3.1 | length 30.9
  Top Layer w12: NT3.1@-1132.88,1149.52 J1.2@-1132.88,1180.4
VBAT_P: J1.1 NT2.1 | length 30.7
  Top Layer w12: NT2.1@-1030.52,1149.72 J1.1@-1030.52,1180.4
VBUS: J2.1 NT1.1 U8.5 | length 338.8
  Top Layer w12: NT1.1@-1468.5,972.4 -1414.4,972.4 -1394.7,992.1 -1394.7,1020.5 -1413.3,1039.1 U8.5@-1413.3,1059.21
  Top Layer w12.38: U8.5@-1413.3,1059.21 -1413.3,1078.7 -1401.08,1090.91 -1386.12,1090.91 -1372.65,1104.39 J2.1@-1372.65,1215.59
VCCD: C29.1 U7.16 | length 107.2
  Top Layer w12: C29.1@-1522.5,858.2 -1483.8,819.5 U7.16@-1431.36,819.5
VDD_NRF: C16.1 C18.1 C28.1 C30.1 C31.1 J3.1 JP8.1 P4.31 U6.13 U6.36 U6.48 U7.1 | length 1854.2
  Top Layer w10: C28.1@-1693.7,93.4 -1686.92,86.62 U6.13@-1631.27,86.62 ; U6.48@-1393.08,86.62 -1348.08,86.62 -1329.6,105.1 -1329.6,144.7 C16.1@-1315.4,158.9
  Top Layer w12: J3.1@-2131.8,362.5 -2119.2,349.9 v1(-2119.2,258.4) ; v1(-1738,137.2) -1694.19,93.4 C28.1@-1693.7,93.4 ; U6.36@-1425.06,-119.09 -1425.06,-146.94 C18.1@-1401.2,-170.8 -1401.2,-171.29 -1385.5,-186.99 -1385.5,-196.1 v1(-1368.9,-212.7) ; C16.1@-1315.4,158.9 -1272.6,116.1 v1(-1272.4,116.1) ; U7.1@-1267.97,656.11 -1249.36,637.5 -1155.5,637.5 C30.1@-1138.9,654.1 C31.1@-1082.9,654.1 ; C31.1@-1073.6,644.8 v1(-1017,644.8) ; v1(-188.9,760.7) -187.7,761.9 v1(104.9,761.9)
  Power Plane w12: v1(-1017,644.8) -1015,642.8 -1015,523.4 ; JP8.1@-412.5,759.7 -412.4,759.6 -411.3,760.7 v1(-188.9,760.7) ; v1(104.9,761.9) 246.8,903.8 P4.31@246.8,1115
VUSB: C32.1 C33.1 JP1.2 NT1.2 P4.29 R15.2 R17.2 U7.19 | length 2478
  Top Layer w12: v1(-1702,709.6) -1701.7,709.6 C33.1@-1669.5,741.8 -1658.5,752.8 C32.1@-1603.5,752.8 -1601.76,754.54 U7.19@-1456.95,754.54 ; R17.2@-1649.8,872.1 v1(-1649.8,908.8) ; v1(-1530.1,971.8) NT1.2@-1490.8,971.8 ; R15.2@-1056.2,814.6 -1054.2,816.6 v1(-1010,816.6)
  Power Plane w12: -1288.8,904.8 -1195.5,904.8 -1107.3,816.6 v1(-1010,816.6)
  Power Plane w20: -1274.5,1261.7 JP1.2@-816.1,1261.7 -768,1309.8 244.3,1309.8 297.6,1256.5 297.6,1164.2 P4.29@346.8,1115
XC_N: C17.1 U6.34 X1.3 | length 364.8
  Top Layer w8: C17.1@-1467.4,-444.7 -1467.4,-406.3 X1.3@-1474,-399.7 -1505.8,-367.9 -1505.8,-297.9 -1453.3,-245.4 -1453.3,-163.95 -1457.06,-160.2 U6.34@-1457.06,-119.09
XC_P: C14.1 U6.35 X1.1 | length 246.5
  Top Layer w8: U6.35@-1441.06,-119.09 -1441.06,-153.57 -1437.3,-157.33 -1437.3,-244.66 -1428.3,-253.66 C14.1@-1428.3,-309.8 -1428.3,-346.97 X1.1@-1418.88,-356.39
XL_N: C22.2 U6.3 X2.2 | length 322.5
  Top Layer w8: C22.2@-1539.8,380.5 -1493.79,380.5 -1464.5,351.21 -1464.5,210.08 -1457.31,202.9 U6.3@-1457.31,119.1
XL_P: C19.2 U6.2 X2.1 | length 335.8
  Top Layer w8: U6.2@-1441.31,119.1 -1441.31,209.52 -1447.9,216.11 -1447.9,269.8 -1383.35,334.35 -1383.35,377.8 C19.2@-1335.7,377.8
pads on no net: ANT1.2 J2.4 J3.0 J3.6 J5.0 J5.1 J5.3 J5.5 U2.6 U4.4 U5.4 U6.44 U7.23 U7.25 U7.26 U7.27 U7.28 U7.29
copper on no net:
  other v1: -1913.2,183.3 -1876.8,228.4

## Polygon pours and split planes (outlines as drawn)
GND on Top Layer "TOP GND" (solid, remove dead copper, pour order 40): -2362.2,-1338.58 -2362.2,1338.58 cw(c-2322.83,1338.58) -2322.83,1377.95 2322.83,1377.95 cw(c2322.83,1338.58) 2362.2,1338.58 2362.2,-1338.58 cw(c2322.83,-1338.58) 2322.83,-1377.95 -2322.83,-1377.95 cw(c-2322.83,-1338.58)
USBGND on Ground Plane "USBGND PLANE" (solid, remove dead copper, pour order 38): -1619.6,1378 -1619.6,1002.95 -1245.1,1002.95 -1245.1,1126.5 -1244.6,1127 -1244.6,1377.95 -1619,1378
GND on Ground Plane "GROUND PLANE" (solid, remove dead copper, pour order 50): -2362.2,-1338.58 -2362.2,1338.58 cw(c-2322.83,1338.58) -2322.83,1377.95 2322.83,1377.95 cw(c2322.83,1338.58) 2362.2,1338.58 2362.2,-1338.58 cw(c2322.83,-1338.58) 2322.83,-1377.95 -2322.83,-1377.95 cw(c-2322.83,-1338.58)
+5V on Power Plane "+5V PLANE" (solid, remove dead copper, pour order 36): -1773.7,1378 -2362.5,1378 -2362.5,-1377.7 -2362.1,-1377.3 2363,-1377.3 2363,-425.9 2361.5,-424.4 2361.2,-424.7 789.4,-424.7 789.4,-888.4 793,-892 785.7,-884.7 -568.9,-884.7 -568.9,-453.7 -576.1,-446.5 -572.5,-450.1 -166.8,-450.1 -166.8,86.5 -168.2,87.9 -171.6,84.5 -746.1,84.5 -746.1,-437.6 -742.7,-441 -748,-435.7 -2155.1,-435.7 -2155.1,606.23 -2154.44,606.89 -1773.3,606.89 -1773.3,1377.8 -1773.4,1377.9
VDD_NRF on Power Plane "M2_8V PLANE" (solid, remove dead copper, pour order 34): -1773.01,606.6 -2156.69,606.89 -2155.1,605.3 -2155.1,-436.8 -1079.4,-436.8 -1078.6,-437.6 -1080.5,-435.7 -1080.5,445.3 -281.3,445.3 -152.62,445.3 -152.62,662.9 -152.62,871 -666,871 -664.1,869.1 -664.1,540.1 -1266.4,540.1 -1268,541.7 -1268,606.6
VUSB on Power Plane "VUSB" (solid, remove dead copper, pour order 32): -1773.3,1378.4 -1773.3,605.9 -1772.6,606.6 -1268,606.6 -1268,1375.6 -1270.7,1378.3 -1773.2,1378.3
VBAT on Power Plane "POWER PLANE" (solid, remove dead copper, pour order 48): -2362.2,-1338.58 -2362.2,1338.58 cw(c-2322.83,1338.58) -2322.83,1377.95 2322.83,1377.95 cw(c2322.83,1338.58) 2362.2,1338.58 2362.2,-1338.58 cw(c2322.83,-1338.58) 2322.83,-1377.95 -2322.83,-1377.95 cw(c-2322.83,-1338.58)
GND on Bottom Layer "BOT GND" (solid, remove dead copper, pour order 46): -2362.2,-1338.58 -2362.2,1338.58 cw(c-2322.83,1338.58) -2322.83,1377.95 2322.83,1377.95 cw(c2322.83,1338.58) 2362.2,1338.58 2362.2,-1338.58 cw(c2322.83,-1338.58) 2322.83,-1377.95 -2322.83,-1377.95 cw(c-2322.83,-1338.58)

## Keep-outs
Mechanical 3:
  circle w10: c2099.31,-0.02 r216.54
  circle w10: c2099.31,-0.02 r994.09
  circle w10: c2101.3,-1.26 r1314.96

## Other copper
Top Layer:
  pour cut-out: -1456.7,819.4 -1456.7,628.4 -1265.7,628.4 -1265.7,629.4 -1265.7,819.4 -1431.36,819.4
  region net NetC6_1: -698.2,-194.09 -698.2,17.51 -697.9,17.82 -698.3,18.22 -818.5,18.22 -818.5,-194.18 -818.4,-194.09
  region net NetC2_1: -699.8,-712.4 -699.8,-844.7 -701.4,-846.3 -1023.4,-846.3 -1023.4,-714.6 -1023.4,-712.4
Ground Plane:
  pour cut-out: -2228.86,-141.95 -2346.97,-141.95 -2346.97,104.51 -2228.86,104.51
Power Plane:
  pour cut-out: -2228.86,-141.95 -2346.97,-141.95 -2346.97,104.51 -2228.86,104.51

## Silkscreen, mask and mechanical layers (free items; w line width, h text height)
Top Overlay:
  text "SHMB Main Board V1" at 1332,122.6 h100
  text "2016/09/09 CycleLabs Solutions inc." at 1435,73.8 h25
Bottom Overlay:
  lines w5: 422.36,1008.8 422.36,1062.7 ; 425.5,1263.45 425.5,1352.55 ; 922.83,894.8 922.83,1057.9 ; 1027.38,972.55 1027.38,1059.75 ; 1125.4,924 1125.4,1064.2 ; 1125.7,1265.78 1125.7,1352.98 ; 1224.04,974.45 1224.04,1061.65 ; 1321.2,1268.22 1321.2,1346.62 ; 1725.4,982 1725.4,1060.4 ; 1726.8,1272.9 1726.8,1351.3
  text "BUSD" at 1263.3,1373.63 h50 r90
  text "S2.8V" at -36.5,1373.5 h50 r90
  text "ISET2" at 861.8,1372.5 h50 r90
  text "USBN" at 1061.6,1372.11 h50 r90
  text "USBP" at 961.4,1371.37 h50 r90
  text "EN_S" at 559.6,1368.8 h50 r90
  text "BCD0" at 1462.4,1367.9 h50 r90
  text "P0.08" at 1560.7,1366.52 h50 r90
  text "EN_20" at 658.4,1366.2 h40 r90
  text "P0.23" at 1661,1366.47 h50 r90
  text "+20V" at 765.1,1364.7 h50 r90
  text "GND" at -136.4,1357.9 h50 r90
  text "GND" at 61.3,1355.2 h50 r90
  text "GND" at 262.6,1354.7 h50 r90
  text "CHG" at 466.5,1355.2 h50 r90
  text "GND" at 362.5,1354.2 h50 r90
  text "DCD" at 1166.2,1354.2 h50 r90
  text "CTS" at 1361.7,1350.5 h50 r90
  text "RXL" at 1767.1,1350.2 h50 r90
  text "+5V" at 160.6,1344.3 h50 r90
  text "VUSB" at -873.2,1245 h50
  text "RT2" at -290.4,1162.1 h50
  text "P0.24" at 1624.1,1068 h50 r90
  text "P0.06" at 1461.5,1066.6 h50 r90
  text "P0.07" at 1557.1,1067.1 h50 r90
  text "EN_5V" at 520.3,1066.1 h50 r90
  text "PG" at 462.3,1065.2 h50 r90
  text "BCD1" at 1361.7,1064.7 h50 r90
  text "TS" at -484.9,1063.9 h50
  text "M2.8V" at 260.8,1064.2 h50 r90
  text "EN_M" at 658.7,1064.2 h50 r90
  text "VBAT" at -139,1063.3 h50 r90
  text "GND" at -37.3,1063.3 h50 r90
  text "+5V" at 62.1,1063.3 h50 r90
  text "GND" at 141,1063.3 h50 r90
  text "VUSB" at 364.9,1062.8 h50 r90
  text "DSR" at 1068.4,1062.8 h50 r90
  text "TXL" at 1766.9,1062.9 h50 r90
  text "RESET" at 1169.87,1061.65 h50 r90
  text "DTR" at 1268.1,1061.9 h50 r90
  text "GND" at 862.6,1061.4 h50 r90
  text "GND" at 763.7,1060.4 h50 r90
  text "POWER" at 968.6,1060.4 h50 r90
  text "CENTRAL_R" at 2053.9,1021.76 h50 r90
  text "CENTRAL_G" at 2157,1022.13 h50 r90
  text "CENTRAL_B" at 2257.4,1017.6 h50 r90
  text "FRONTLED" at 1960.3,993.76 h50 r90
  text "RT1" at -485.9,967.6 h50
  text "M2.8V" at -466.8,748.4 h50
  text "VBAT" at -679.5,746.5 h50
  text "GND" at 1960.3,490 h50 r90
  text "SDB" at 2063.1,490 h50 r90
  text "SDA" at 2161.6,490 h50 r90
  text "SCL" at 2263.6,490 h50 r90
  text "VBAT" at -677.9,348.2 h50
  text "S2.8V" at -463.1,348.2 h50
  text "+5V" at -432.8,-69.5 h50
  text "VBAT" at -729.2,-72.9 h50
  text "GND" at 2063.4,-386.2 h50 r90
  text "+5V" at 2163.8,-395.7 h50 r90
  text "VBAT" at -984.4,-689.3 h50
  text "+20V" at -424.4,-689.3 h50
  text "P0.19" at -37.3,-874.3 h50 r90
  text "P0.16" at -137.6,-875.7 h50 r90
  text "GPIO02" at 1461.7,-893.3 h50 r90
  text "P0.20" at 164.4,-937.7 h50 r90
  text "P0.25" at 367,-938.48 h50 r90
  text "P0.09" at 466.9,-938.67 h50 r90
  text "P0.10" at 567.3,-938.81 h50 r90
  text "P0.28" at 864.4,-938.67 h50 r90
  text "P0.29" at 1062.6,-938.67 h50 r90
  text "P0.02" at 1564.8,-939.04 h50 r90
  text "P0.03" at 1664.2,-938.71 h50 r90
  text "P0.27" at 662,-942.8 h50 r90
  text "P0.31" at 1165.2,-944.91 h50 r90
  text "GND" at 106.3,-954.9 h50 r90
  text "GND" at 264.9,-955.49 h50 r90
  text "GND" at 722.4,-955.5 h50 r90
  text "GND" at 964.8,-955.49 h50 r90
  text "GND" at 1264.5,-955.49 h50 r90
  text "GND" at 1364.4,-955.49 h50 r90
  text "GND" at 1764.1,-955.49 h50 r90
  text "P0.26" at 963.8,-1257 h50 r90
  text "P0.05" at 1661.7,-1257.4 h50 r90
  text "P0.15" at -139.5,-1258.9 h50 r90
  text "P0.13" at 161.9,-1259.3 h50 r90
  text "P0.12" at 561.7,-1258.9 h50 r90
  text "P0.30" at 1161.1,-1259.8 h50 r90
  text "P0.04" at 1563.3,-1259.8 h50 r90
  text "P0.11" at 660.1,-1260.8 h50 r90
  text "P0.21" at 363,-1262.2 h50 r90
  text "GND" at 263.2,-1263.1 h50 r90
  text "GND" at -37.2,-1263.6 h50 r90
  text "GND" at 61.9,-1263.6 h50 r90
  text "GND" at 462.6,-1263.6 h50 r90
  text "GND" at 763.7,-1263.6 h50 r90
  text "GND" at 863.3,-1263.6 h50 r90
  text "GND" at 1062.4,-1263.6 h50 r90
  text "GND" at 1263.9,-1263.6 h50 r90
  text "GND" at 1362.5,-1263.6 h50 r90
  text "GND" at 1464,-1263.6 h50 r90
  text "GND" at 1761.8,-1263.6 h50 r90
Outline:
  the board outline again, w3.94
Mechanical 2:
  lines w10: -2805.98,-2755.98 -958.83,-2755.98
Mechanical 4:
  text "No changes to materials and/or gerber files are permitted without written approval from Smart Halo. /   / 1.       Board spec. /          a.       Board shall be manufactured to meet all spec. defined under the latest revision of IPC-6012 class 2 & IPC-A-600 class 2. / 2.       Material /          a.       See PCB requirement spec PDF /          b.      Material must be lead free compliant per IPC-4101A/24 or /26. /          c.       Maximum thickness 0.062\" +/- 0.006\" measured over solder mask /          d.      Outer layers copper foil (    )1/2 OZ./SQ.FT OR (X)1 OZ./SQ.FT OR (    )2 OZ./SQ.FT. /          e.      Inner layers copper foil (    )1/2 OZ./SQ.FT OR ( X)1 OZ./SQ.FT OR (    )2 OZ./SQ.FT. /          f.        Boards rated & identified to UL 94V0. / 3.       Gerber files /          a.       Supplied gerber files must not be modified by manufacturer without prior permission from Smart Halo. /          b.      Copper addition is not permitted on any layers unless otherwise specified. /          c.       Copper addition in breakaway areas for panel forms is acceptable. /          d.      Manufacturing logo, UL and date code must be added as specified on panel from mechanical drawing. /          e.      Gerber traces, components pads & vias pads widths are finished widths. Finished width accuracy on inner layers +/- 0.001\". / 4.       Plated Holes /          a.       Plated thru holes, unless otherwise specified, are sizes show after plating. Wall thickness of plated thru holes shall be 0.001¨, min etch back or smear removals shall be 0.0002\" min and 0.003\"max. / 5.       Solder mask /          a.       Apply photo imageable solder mask as per specification IPC-SM-840 to both sides of PWB over bare copper, WHITE, Taiyo PSR-4000 WT05 /          b.      Solder mask thickness: 0.0008\"min.  /  0.001\" max. /          c.       Solder mask registration: +/- 0.002\" /          d.      In order to avoid oversizing of components pads being part of copper plane or vias, solder mask must not be modified. Solder mask compensation already applied in gerber files in order to meet registration value. /          e.      Soldermask :  no soldermask opening should be more then 3 mils expansion from the pad size. For BGA, LGA and QFN or QFP Fine Pitch,  max 2.5 mils expansion.  / 6.       Finish /          a.       RoHS compliant (EU directive 2002/95/EC) 2-10 uIN immersion Gold over 50-200 uIN Electroless Nickel (ENIG). /          b.      No exposed copper. / 7.       Silkscreen /          a.       Apply silkscreen to top & bottom side of PWB using non conductive BLACK epoxy based ink. /          b.      Cut silkscreen using solder mask clearance. / 8.       Electrical test /          a.       100% electrical testing required. / 9.       Vias /          a.       All via diameter to be within tolerance specified in point 3. / 10.   Stackup /          a.       Material as per stackup drawing. See PCB requirement spec PDF" at 4006,-997.1 h78.74
Mechanical 5:
  text "All dimensions in mm unless otherwise noted" at 566,1601.5 h60
Drill Drawing:
  circle w10: c-2406.47,3169.33 r20
  circle w10: c-2406.47,3169.33 r33.33
  circle w10: c-2406.47,3019.33 r33.33
  lines w10: -2439.8,3286 -2373.14,3286 -2373.14,3352.67 -2439.8,3352.67 -2439.8,3286 ; -2439.8,3502.67 -2373.14,3502.67 -2406.47,3436 -2439.8,3502.67 ; -2439.8,3619.33 -2406.47,3586 -2373.14,3619.33 -2406.47,3652.67 -2439.8,3619.33 ; -2439.8,3802.67 -2373.14,3802.67 -2406.47,3736 -2439.8,3802.67 ; -2439.8,3886 -2406.47,3902.67 -2373.14,3886 -2389.8,3919.33 -2373.14,3952.67 -2406.47,3936 -2439.8,3952.67 -2423.14,3919.33 -2439.8,3886 ; -2439.8,4036 -2439.8,4052.67 -2423.14,4069.33 -2439.8,4086 -2439.8,4102.67 -2423.14,4102.67 -2406.47,4086 -2389.8,4102.67 -2373.14,4102.67 -2373.14,4086 -2389.8,4069.33 -2373.14,4052.67 -2373.14,4036 -2389.8,4036 -2406.47,4052.67 -2423.14,4036 -2439.8,4036 ; -2426.47,3789.33 -2386.47,3789.33 -2406.47,3749.33 -2426.47,3789.33
  lines w15: -2499.59,2941 3702.7,2941 ; -2499.59,4141 3702.7,4141 ; -1948.72,2791 -1948.72,4291 ; -1348.88,2791 -1348.88,4291 ; -249.2,2791 -249.2,4291 ; 256.68,2791 256.68,4291 ; 990.48,2791 990.48,4291 ; 2324.09,2791 2324.09,4291 ; -2499.59,2791 3702.7,2791 3702.7,4291 -2499.59,4291 -2499.59,2791
  text "Symbol" at -2409.59,4186 h72
  text "Count" at -1903.72,4186 h72
  text "Hole Size" at -1303.88,4186 h72
  text "Plated" at -204.2,4186 h72
  text "Hole Type" at 301.68,4186 h72
  text "Hole Tolerance (+)" at 1035.48,4186 h72
  text "Hole Tolerance (-)" at 2369.09,4186 h72
  text "2" at -1903.72,4036 h60
  text "0.500mm (19.69mil)" at -1303.88,4036 h60
  text "PTH" at -204.2,4036 h60
  text "Slot" at 301.68,4036 h60
  text "2" at -1903.72,3886 h60
  text "0.550mm (21.65mil)" at -1303.88,3886 h60
  text "PTH" at -204.2,3886 h60
  text "Slot" at 301.68,3886 h60
  text "2" at -1903.72,3736 h60
  text "1.020mm (40.16mil)" at -1303.88,3736 h60
  text "PTH" at -204.2,3736 h60
  text "Round" at 301.68,3736 h60
  text "3" at -1903.72,3586 h60
  text "0.991mm (39.00mil)" at -1303.88,3586 h60
  text "NPTH" at -204.2,3586 h60
  text "Round" at 301.68,3586 h60
  text "0.076mm (3.00mil)" at 1035.48,3586 h60
  text "0.076mm (3.00mil)" at 2369.09,3586 h60
  text "4" at -1903.72,3436 h60
  text "2.375mm (93.50mil)" at -1303.88,3436 h60
  text "NPTH" at -204.2,3436 h60
  text "Round" at 301.68,3436 h60
  text "0.076mm (3.00mil)" at 1035.48,3436 h60
  text "0.076mm (3.00mil)" at 2369.09,3436 h60
  text "69" at -1903.72,3286 h60
  text "0.254mm (10.00mil)" at -1303.88,3286 h60
  text "PTH" at -204.2,3286 h60
  text "Round" at 301.68,3286 h60
  text "109" at -1903.72,3136 h60
  text "0.900mm (35.43mil)" at -1303.88,3136 h60
  text "PTH" at -204.2,3136 h60
  text "Round" at 301.68,3136 h60
  text "369" at -1903.72,2986 h60
  text "0.330mm (13.00mil)" at -1303.88,2986 h60
  text "PTH" at -204.2,2986 h60
  text "Round" at 301.68,2986 h60
  text "560 Total" at -1903.72,2836 h60
  text "Slot definitions :" at -2409.59,2691.03 h60
  text "Routed Path Length" at -1376.9,2691.03 h60
  text "= Calculated from tool start centre position to tool end centre position." at -274.24,2691.03 h60
  text "Hole Length" at -1376.9,2591.05 h60
  text "= Routed Path Length + Tool Size = Slot length as defined in the PCB layout" at -684.1,2591.05 h60